# Altium PCB Output_Circuit.PcbDoc
Units mm, origin at the board's own origin, x right, y up, seen from the top; angles counter-clockwise.
Board outline 50 x 100 mm, 2 copper layers (Top Layer, Bottom Layer); 31 components, 29 nets, 78 pads, 6 vias.
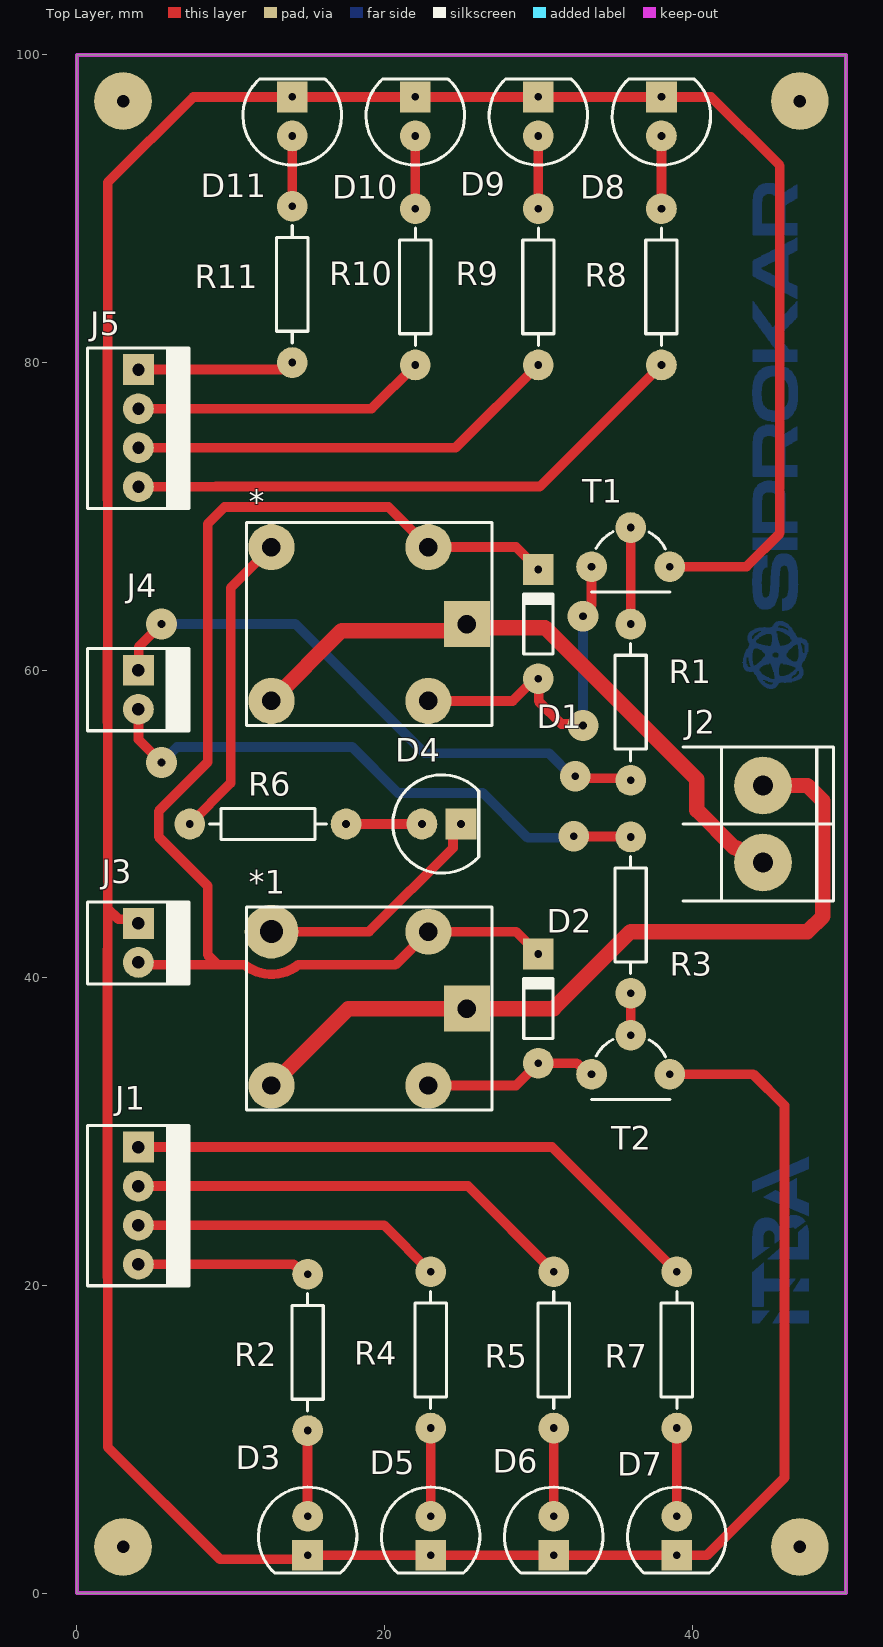
[diagram p0: Top Layer view]
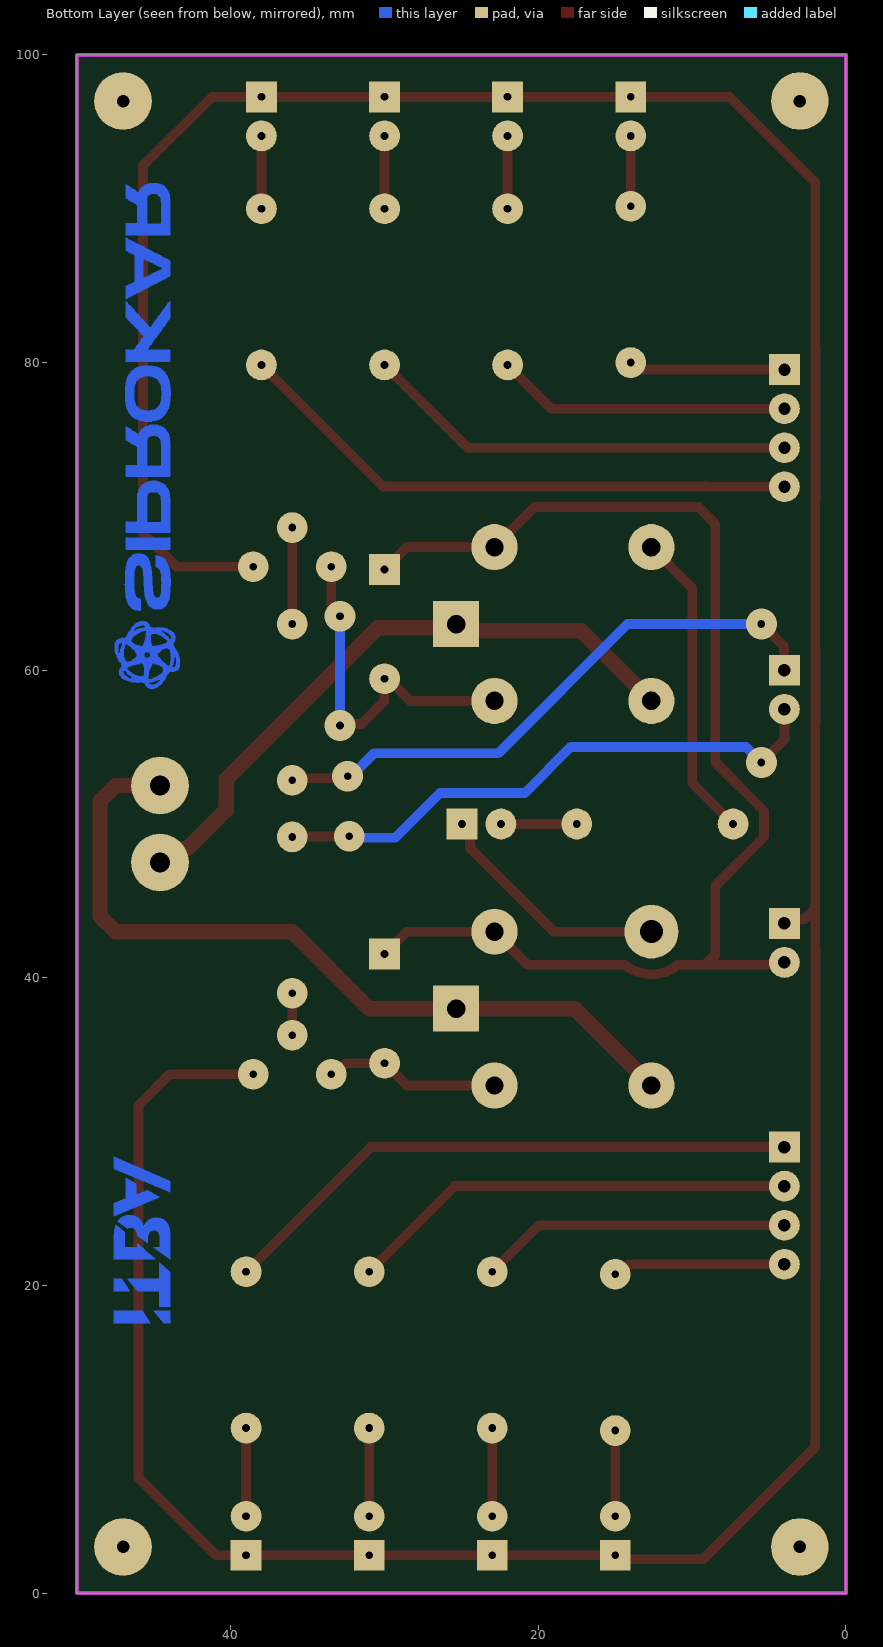
[diagram p1: Bottom Layer view, seen from below]

## Layer stack, top to bottom
Top Solder: solder mask 0.0102, Solder Resist, Dk 3.5
Top Layer: signal copper 0.0356
Dielectric 1: dielectric 0.32, FR-4, Dk 4.8
Bottom Layer: signal copper 0.0356
Bottom Solder: solder mask 0.0102, Solder Resist, Dk 3.5

## Board outline
0,0 0,100 50,100 50,0

## Design rules (kind name [scope] priority, off if disabled: settings)
Clearance [All] p1: gap=0.7 ignorepadtopadclearanceinfootprint=TRUE
PolygonConnect [All] p1: connectstyle=Relief reliefconductorwidth=0.254 reliefentries=4 polygonreliefangle="90 Angle" airgapwidth=0.254
RoutingVias [All] p1: holewidth=0.711 width=1.27 viastyle="Through Hole" minholewidth=0.711 minwidth=1.27 maxholewidth=0.711 maxwidth=1.27
SilkToSolderMaskClearance [IsPad] p1: minsilkscreentomaskgap=0 clearancetoexposedcopper=TRUE
SolderMaskExpansion [All] p1: expansion=0.102 istentingtop=FALSE
Width [All] p1: maxlimit=1 minlimit=0.254 preferedwidth=0.75
29 further rules are at their usual default settings.

## Components (designator, comment, footprint, x,y, rotation, side; value= is the part's Value field where it differs from the comment)
* "RELE SIMPLE" "RELE SERIE 964"#1 19,63 r180 top
*1 "RELE SIMPLE" "RELE SERIE 964"#2 19,38 r180 top
D1 "Diode 1N4148" DO-35 30,63 r90 top
D2 "Diode 1N4148" DO-35 30,38 r90 top
D3 "LED" LED5 15,3.73 r270 top
D4 "LED" LED5 23.7,50 r0 top
D5 "LED" LED5 23,3.73 r270 top
D6 "LED" LED5 31,3.73 r270 top
D7 "LED" LED5 39,3.73 r270 top
D8 "LED" LED5 38,96 r90 top
D9 "LED" LED5 30,96 r90 top
D10 "LED" LED5 22,96 r90 top
D11 "LED" LED5 14,96 r90 top
J1 "MOLEX4" MOLEX4#1 4,29 r270 top
J2 "BORNERA 2" BORNERA2 44.6,50 r180 top
J3 "MOLEX2" MOLEX2 4,43.54 r270 top
J4 "MOLEX2" MOLEX2 4,60 r270 top
J5 "MOLEX4" MOLEX4#2 4,79.54 r270 top
R1 "1K" RES400 36,52.84 r90 top
R2 "1K" RES400 15,20.73 r270 top
R3 "1K" RES400 36,49.16 r270 top
R4 "1K" RES400 23,20.89 r270 top
R5 "1K" RES400 31,20.89 r270 top
R6 "1K" RES400 17.5,50 r180 top
R7 "1K" RES400 39,20.89 r270 top
R8 "1K" RES400 38,79.84 r90 top
R9 "1K" RES400 30,79.84 r90 top
R10 "1K" RES400 22,79.84 r90 top
R11 "1K" RES400 14,80 r90 top
T1 "BC547" TO92 36,68 r180 top
T2 "BC547" TO92 36,35 r180 top

## Footprints (in the part's own frame and the unit in brackets; to place one, negate y for a bottom-side part, rotate by r counter-clockwise, add the part's x,y. Pads: shape width x height; smd on the part's side, far side on the other; paste and mask are expansions set on the pad)
BORNERA2 [mm] "Bornera con Tornillos 5mm separación"
  round 3.75 hole 1.3: 1(0,2.5) 2(0,-2.5)
  silkscreen extent -4.6,-5 5.2,5, body extent -3.76,-4.89 3.94,5.61, height 10
DO-35 [mm] "Diode, Axial; Body 3.8 x 1.9 mm (LxDia. max), Lead Dia. 0.53 mm (max)"
  round 2 hole 0.5: 1(-3.55,0)
  rect 2x2 hole 0.5: 2(3.55,0)
  silkscreen extent -1.95,-0.95 2.05,0.95
LED5 [mm]
  round 2 hole 0.5: 1(-1.27,0)
  rect 2x2 hole 0.5: 2(1.27,0)
  silkscreen extent -3.16,-3.2 2.43,3.2, body extent -2.96,-2.97 2.46,3.05, height 12.31
MOLEX2 [mm]
  rect 2x2 hole 0.816: 1(0,0)
  round 2 hole 0.816: 2(2.54,0)
  silkscreen extent -1.4,-3.3 3.94,3.3, body extent -1.27,-3.18 3.81,3.18, height 10.74
MOLEX4#1 [mm]
  rect 2x2 hole 0.816: 1(0,0)
  round 2 hole 0.816: 2(2.54,0) 3(5.08,0) 4(7.62,0)
  silkscreen extent -1.4,-3.3 9.02,3.3, body extent -1.27,-3.18 8.89,3.18, height 10.74
MOLEX4#2 [mm]
  rect 2x2 hole 0.8: 1(0,0)
  round 2 hole 0.8: 2(2.54,0) 3(5.08,0) 4(7.62,0)
  silkscreen extent -1.4,-3.3 9.02,3.3, body extent -1.27,-3.18 8.89,3.18, height 10.74
"RELE SERIE 964"#1 [mm]
  round 3 hole 1.2: B1(-3.85,-5) B2(-3.85,5) NA1(6.35,-5) NC1(6.35,5)
  rect 3x3 hole 1.2: C1(-6.35,0)
  silkscreen extent -7.99,-6.6 7.99,6.6, body extent -7.85,-6.1 7.85,6.2, height 13.66
"RELE SERIE 964"#2 [mm]
  round 3 hole 1.2: B1(-3.85,-5) B2(-3.85,5) NC1(6.35,5)
  rect 3x3 hole 1.2: C1(-6.35,0)
  round 3.5 hole 1.5: NA1(6.35,-5)
  silkscreen extent -7.99,-6.6 7.99,6.6, body extent -7.85,-6.1 7.85,6.2, height 13.66
RES400 [mm]
  round 2 hole 0.5: 1(0,0) 2(10.16,0)
  silkscreen extent 1.27,-1.02 8.89,1.02, body extent -0.3,-1.14 10.46,1.17, height 2.43
TO92 [mm]
  round 2 hole 0.5: 1(0,-1.27) 2(2.54,1.27) 3(-2.54,1.27)
  silkscreen extent -2.54,-1 2.54,2.92, body extent -2.79,-1.55 2.79,2.79, height 8

## Part data
D1 D2: library part CMP-004-00051-1, "High Conductance Fast Diode", Case/Package="Diode, Axial; Body 3.8 x 1.9 mm (LxDia. max), Lead Dia. 0.53 mm (max)", Code_JEDEC=DO-204-AH, Component Type=Standard, ComponentLink1Description="Manufacturer Link", ComponentLink1URL=http://www.fairchildsemi.com/, ComponentLink2Description=Datasheet, ComponentLink2URL=http://www.fairchildsemi.com/ds/1N%2F1N4148.pdf, DatasheetVersion=1997, Design Item ID="Diode 1N4148", LatestRevisionDate=17-Jul-2002, LatestRevisionNote="Re-released for DXP Platform.", PackageReference=DO-35, Pins=2, Published=8-Jun-2000, Publisher="Altium Limited", Source="Miscellaneous Devices.SchLib"
D3 D4 D5 D6 D7 D8 D9 D10 D11: library part CMP-004-00081-1, Component Type=Standard, Design Item ID=LED, Pins=2, Source=Schematics.SchLib
J2: library part CMP-043-000008-1, Component Type=Standard, Design Item ID="BORNERA 2", Pin Count=2, Source=Schematics.SchLib
R1 R2 R3 R4 R5 R6 R7 R8 R9 R10 R11: library part CMP-009-00195-1, Component Type=Standard, Design Item ID=RES, Pins=2, Source=Schematics.SchLib
T1 T2: library part CMP-012-00019-1, Component Type=Standard, Design Item ID="TRANSISTOR NPN", Pins=3, Source=Schematics.SchLib

## Free pads (board coordinates)
  round 3.75 hole 0.813: 2(3,3) 2(3,97) 2(47,3) 2(47,97)

## Via types
v1: diameter 2, hole 0.5, Top Layer to Bottom Layer, 6 vias

## Nets (pads, with @x,y where several pads share a name; then routed paths per layer and width w, separated by ;. In a path a pad name is that pad's centre, name@x,y a point inside that pad or via, vN(x,y) a via of type N, cw(c..) or ccw(c..) an arc to the next point about the centre after c; other vN are vias at no path point)
+5V: *1.B1 *.B1 D1.2 D2.2 J3.2 | length 83
  Top Layer w0.635: J3.2 4.15,40.85 9.15,40.85 ; D2.2 28.55,43 *1.B1 20.7,40.85 14.393,40.85 cw(c12.65,43) 10.907,40.85 9.15,40.85 ; D1.2 28.55,68 *.B1 20.25,70.6 9.6,70.6 8.5,69.5 8.5,54.013 5.322,50.836 5.322,49.164 8.5,45.987 8.5,41.5 9.15,40.85
ESP32: J4.1 R1.1 | length 38.3
  Top Layer w0.635: J4.1 4.025,60.025 4.025,61.525 v1(5.5,63) ; v1(32.4,53.1) 32.53,52.97 35.87,52.97 R1.1
  Bottom Layer w0.635: v1(5.5,63) 14.2,63 22.6,54.6 30.69,54.6 32.19,53.1 v1(32.4,53.1)
ESP32_CAN: J1.1 R7.1 | length 38.4
  Top Layer w0.635: J1.1 30.89,29 R7.1
ESP32_CUR: J1.3 R4.1 | length 20.3
  Top Layer w0.635: J1.3 19.97,23.92 R4.1
ESP32_TMP: J1.2 R5.1 | length 29.3
  Top Layer w0.635: J1.2 25.43,26.46 R5.1
ESP32_VLT: J1.4 R2.1 | length 11.3
  Top Layer w0.635: J1.4 14.096,21.38 14.746,20.73 R2.1
FPGA: J4.2 R3.1 | length 37.5
  Top Layer w0.635: J4.2 4,55.5 v1(5.5,54) ; v1(32.3,49.2) 32.32,49.18 35.98,49.18 R3.1
  Bottom Layer w0.635: v1(5.5,54) 6.5,55 17.9,55 20.883,52.018 26.391,52.018 29.309,49.1 32.2,49.1 v1(32.3,49.2)
FPGA_AN: J5.1 R11.1 | length 10.2
  Top Layer w0.635: J5.1 13.286,79.54 13.746,80 R11.1
FPGA_CUR: J5.3 R9.1 | length 28.2
  Top Layer w0.635: J5.3 24.62,74.46 R9.1
FPGA_TMP: J5.2 R10.1 | length 19.2
  Top Layer w0.635: J5.2 19.16,77 R10.1
FPGA_VLT: J5.4 R8.1 | length 37.3
  Top Layer w0.635: J5.4 9.032,71.92 9.047,71.935 30.095,71.935 R8.1
GND: D3.2 D5.2 D6.2 D7.2 D8.2 D9.2 D10.2 D11.2 J3.1 T1.3 T2.3 | length 246.2
  Top Layer w0.635: J3.1 3.731,43.809 2.691,43.809 2,44.5 ; T2.3 43.97,33.73 46,31.7 46,7.5 40.96,2.46 D7.2 D6.2 D5.2 D3.2 14.74,2.2 9.3,2.2 2,9.5 2,20.527 1.982,20.544 1.982,41.836 2,41.853 2,44.5 ; T1.3 43.53,66.73 45.7,68.9 45.7,92.8 41.23,97.27 D8.2 D9.2 D10.2 D11.2 7.57,97.27 2,91.7 2,80.979 1.982,80.961 1.982,71.084 2,71.067 2,61.439 1.982,61.421 1.982,56.624 2,56.607 2,44.5
KGND: *1.C1 *1.NC1 J2.2 | length 52.2
  Top Layer w1: *1.NC1 17.65,38 *1.C1 31,38 36,43 47.5,43 48.5,44 48.5,51.5 47.5,52.5 J2.2
KVCC: *.C1 *.NC1 J2.1 | length 41.6
  Top Layer w1: *.NC1 17.218,62.568 24.918,62.568 *.C1 25.582,62.768 30.432,62.768 40.3,52.9 40.3,50.9 42.764,48.436 42.919,48.436 43.856,47.5 J2.1
Net*1_B2: *1.B2 D2.1 T2.2 | length 11.5
  Top Layer w0.635: *1.B2 28.55,33 D2.1 32.499,34.45 33.219,33.73 T2.2
Net*1_NA1: *1.NA1 D4.2 | length 15.8
  Top Layer w0.635: *1.NA1 19,43 24.446,48.446 24.446,49.476 D4.2
Net*_B2: *.B2 D1.1 T1.2 | length 23.3
  Top Layer w0.635: *.B2 28.329,58 29.779,59.45 D1.1 30.021,59.429 30.021,57.979 31.504,56.496 32.804,56.496 v1(32.9,56.4) ; v1(32.9,63.5) 32.9,63.672 33.46,64.232 T1.2
  Bottom Layer w0.635: v1(32.9,56.4) v1(32.9,63.5)
Net*_NA1: *.NA1 R6.2 | length 20.2
  Top Layer w0.635: R6.2 10,52.66 10,65.35 *.NA1
NetD3_1: D3.1 R2.2 | length 5.3
  Top Layer w0.635: D3.1@15,5.27 R2.2
NetD4_1: D4.1 R6.1 | length 4.9
  Top Layer w0.635: R6.1 D4.1
NetD5_1: D5.1 R4.2 | length 5.5
  Top Layer w0.635: D5.1@23,5.27 R4.2
NetD6_1: D6.1 R5.2 | length 5.7
  Top Layer w0.635: D6.1 R5.2
NetD7_1: D7.1 R7.2 | length 5.7
  Top Layer w0.635: D7.1 R7.2
NetD8_1: D8.1 R8.2 | length 4.7
  Top Layer w0.635: R8.2 D8.1
NetD9_1: D9.1 R9.2 | length 4.7
  Top Layer w0.635: R9.2 D9.1
NetD10_1: D10.1 R10.2 | length 4.7
  Top Layer w0.635: R10.2 D10.1
NetD11_1: D11.1 R11.2 | length 4.6
  Top Layer w0.635: R11.2 D11.1
NetR1_2: R1.2 T1.1 | length 6.3
  Top Layer w0.635: R1.2 T1.1
NetR3_2: R3.2 T2.1 | length 2.7
  Top Layer w0.635: T2.1 R3.2

## Keep-outs
Keep-Out Layer:
  the board outline again, w0.254

## Other copper
Bottom Layer:
  drawing of 17 lines, arcs and shapes, not listed